# Altium PCB Controller.PcbDoc
Units mm, origin at the board's own origin, x right, y up, seen from the top; angles counter-clockwise.
Board outline 100 x 100 mm, 2 copper layers (Top Layer, Bottom Layer); 58 components, 87 nets, 249 pads, 178 vias.
Unrouted connection lines stored in the file: 3.
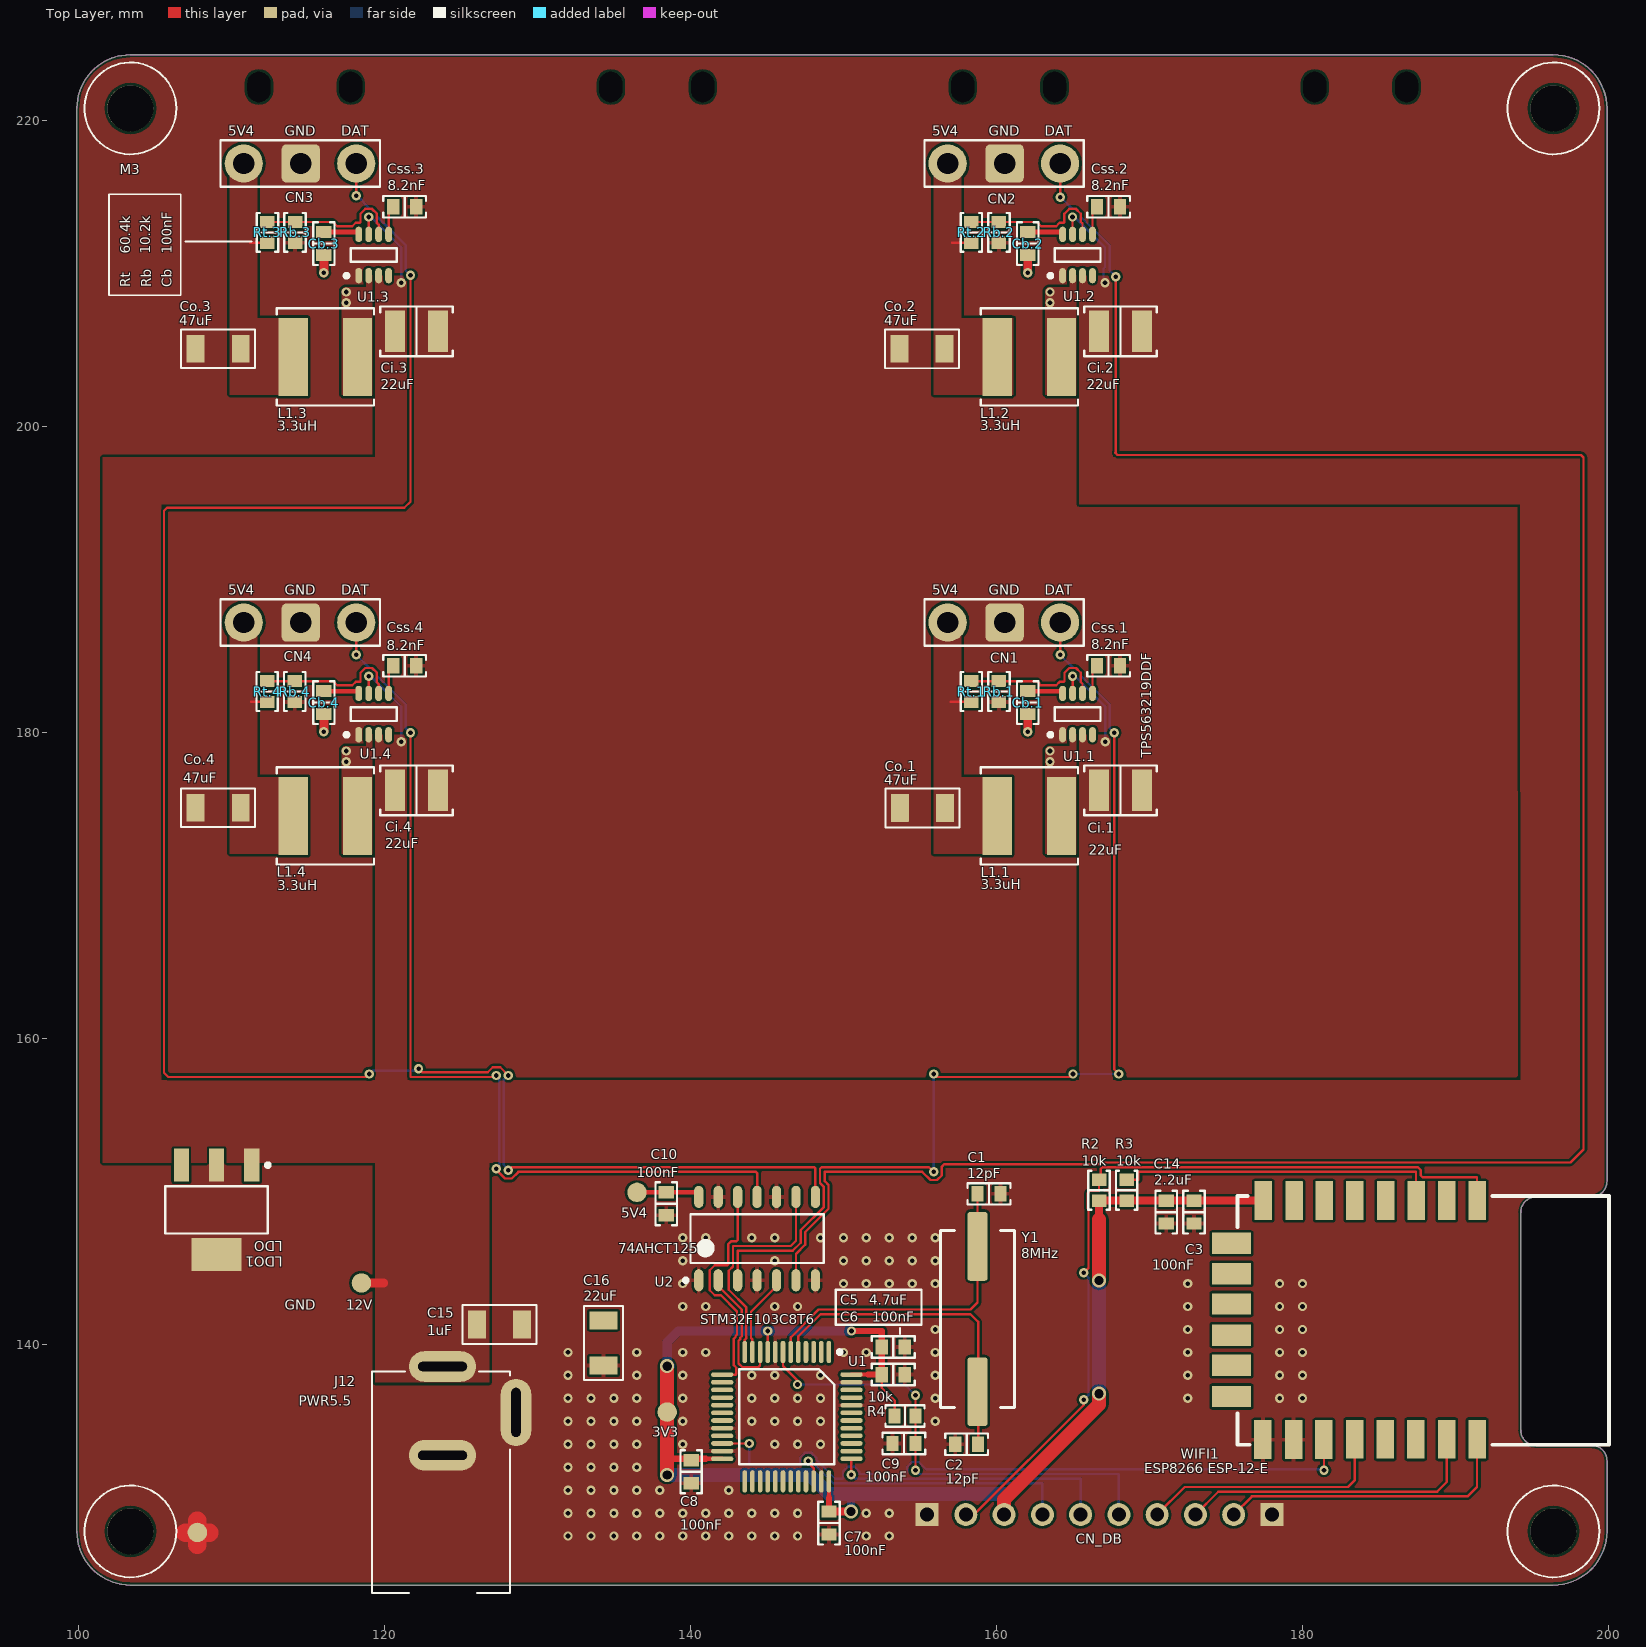
[diagram p0: Top Layer view]
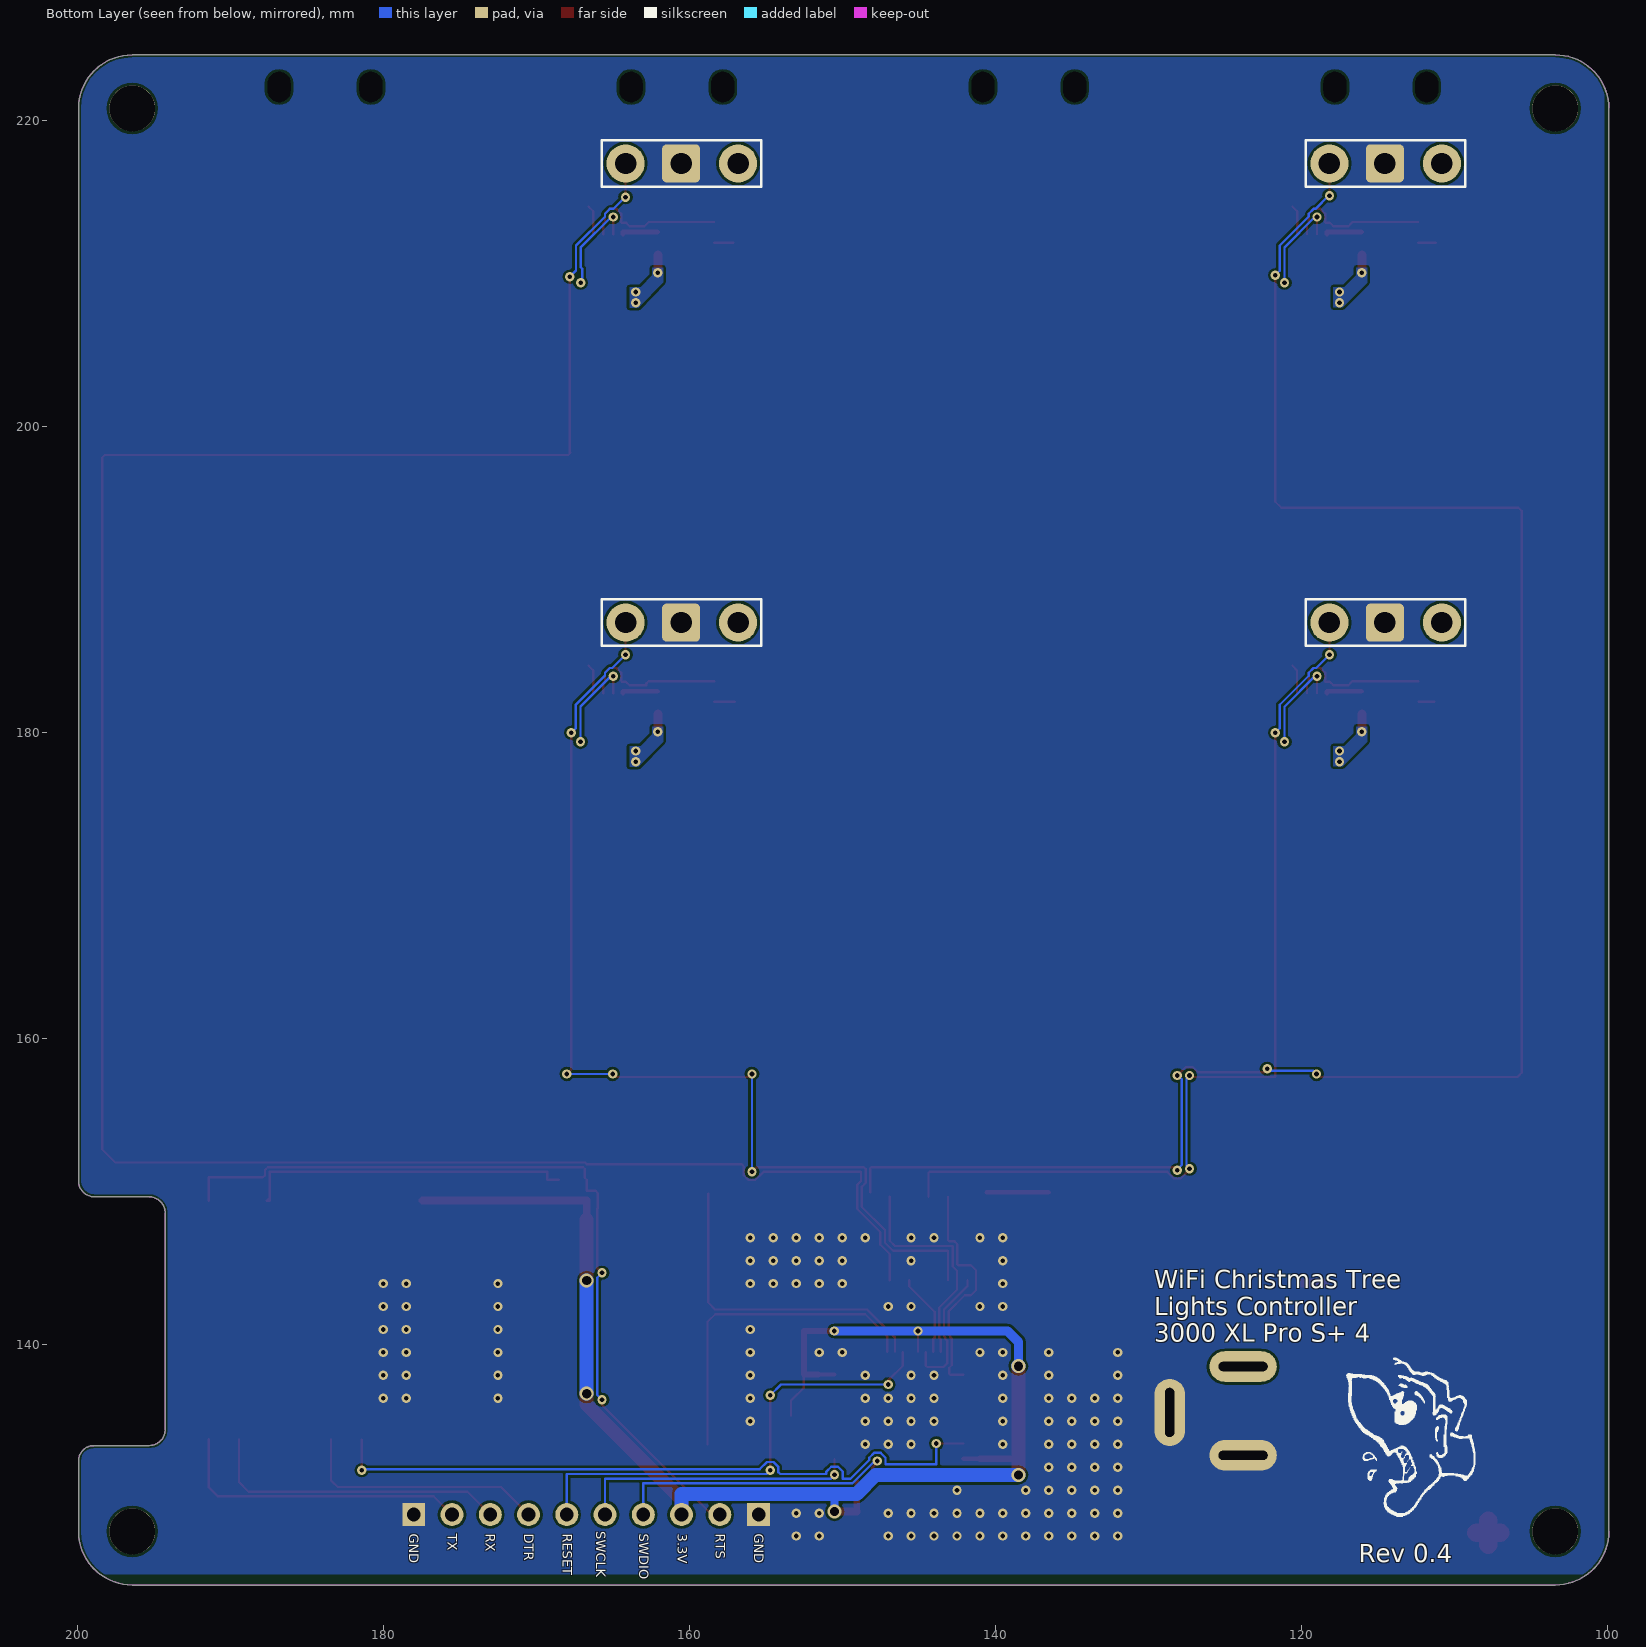
[diagram p1: Bottom Layer view, seen from below]
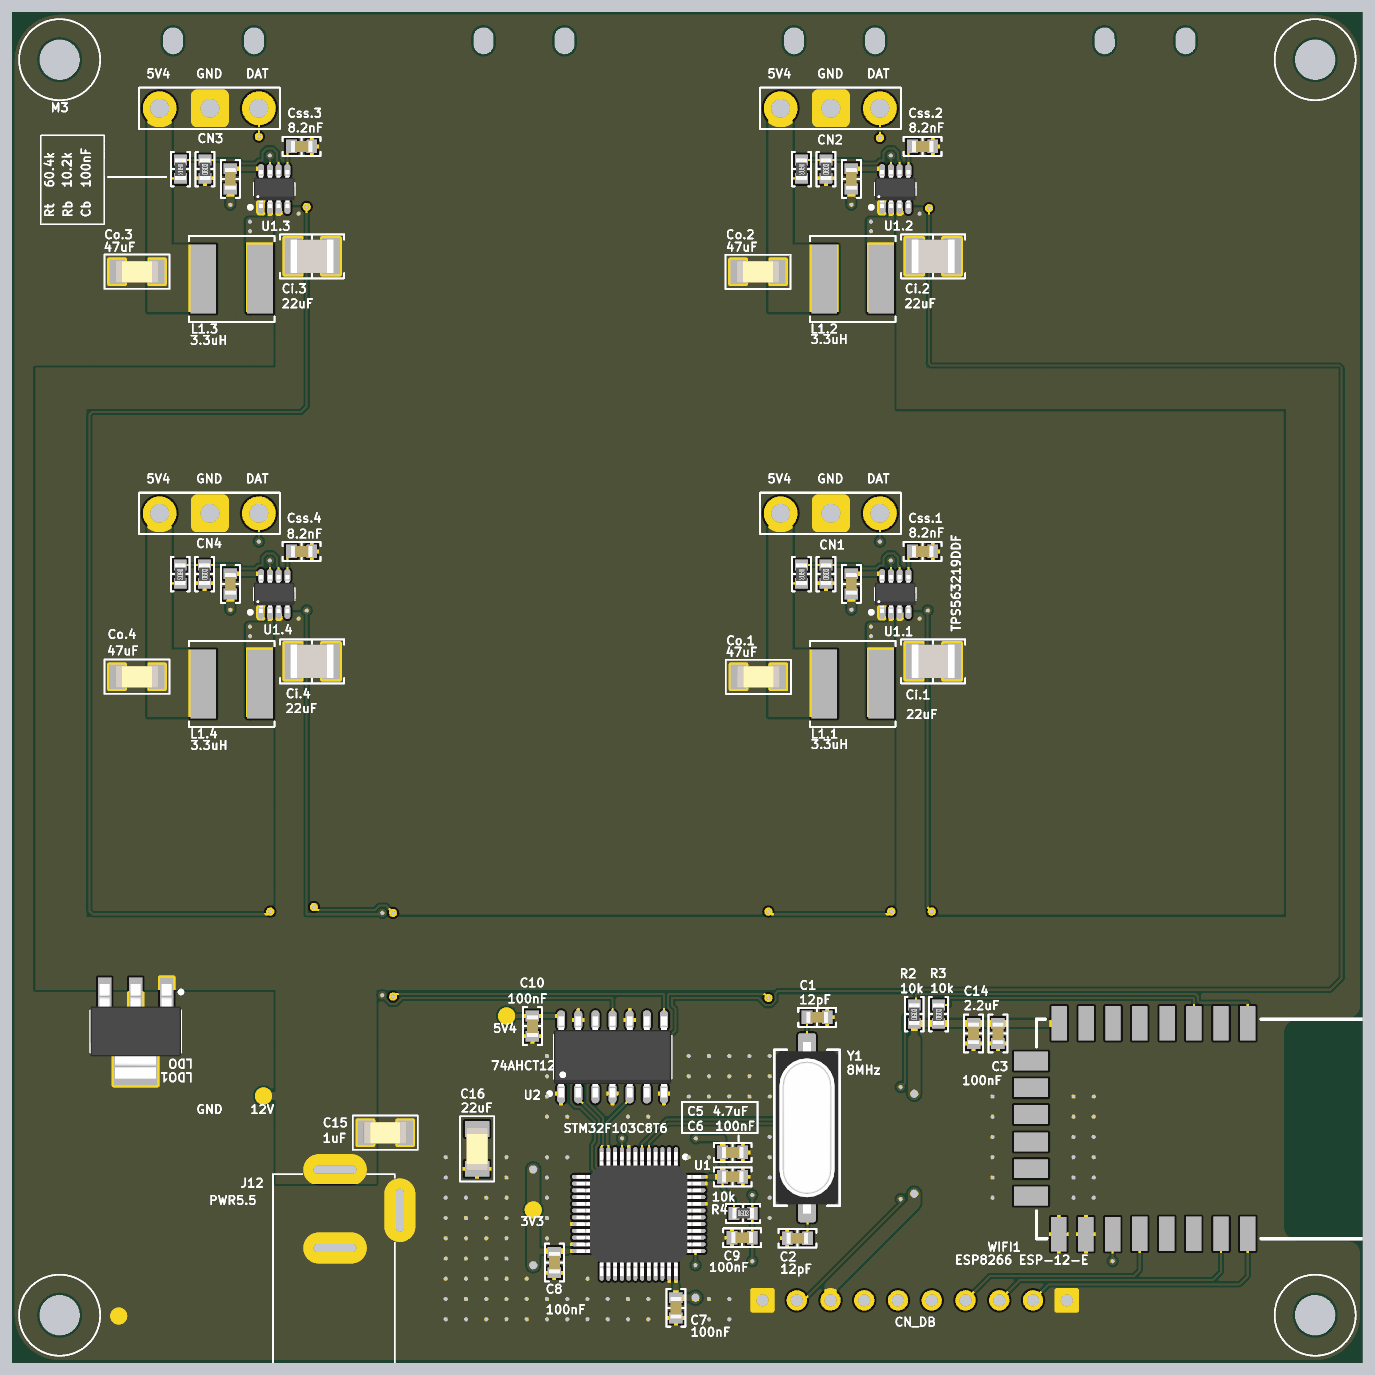
[diagram p2: 3D render of the assembled board from above, using the file's embedded part models]

## Layer stack, top to bottom
Top Solder: solder mask 0.0102, Solder Resist, Dk 3.5
Top Layer: signal copper 0.0356
Dielectric 1: dielectric 0.32, FR-4, Dk 4.8
Bottom Layer: signal copper 0.0356
Bottom Solder: solder mask 0.0102, Solder Resist, Dk 3.5

## Board outline
103.4,124.3 cw(c103.4,127.8) 99.9,127.8 99.9,220.8 cw(c103.4,220.8) 103.4,224.3 196.4,224.3 cw(c196.4,220.8) 199.9,220.8 199.9,150.7 cw(c198.886,150.686) 198.9,149.673 195.3,149.673 ccw(c195.3,148.625) 194.252,148.625 194.252,134.448 ccw(c195.283,134.448) 195.283,133.417 198.9,133.417 cw(c198.9,132.417) 199.9,132.417 199.9,127.8 cw(c196.4,127.8) 196.4,124.3

## Design rules (kind name [scope] priority, off if disabled: settings)
AssemblyTestPointUsage [All] p1 off:
AssemblyTestpoint [All] p1 off: testpointundercomponent=TRUE minsize=1.016 maxsize=2.54 preferedsize=1.524 minholesize=0 maxholesize=1.016 preferedholesize=0.813 testpointgrid=0.025 usegrid=TRUE gridtolerance=0 allowsidetop=TRUE allowsidebottom=TRUE
Clearance "Stitching GND" [IsStitchingVia and InNet('GND') vs (IsVia and (Not IsStitchingVia)) Or IsPad] p1: gap=0.406 except(0.66: Via-Via)
Clearance [All] p2: gap=0.152 except(0.165: THPad-Poly; 0.178: Track-SMDPad)
FabricationTestPointUsage [All] p1 off: valid=0 allowmultiple=FALSE
FabricationTestpoint [All] p1 off: side=3 testpointundercomponent=TRUE minsize=1.016 maxsize=2.54 preferedsize=1.524 minholesize=0 maxholesize=1.016 preferedholesize=0.813 testpointgrid=0.025 allowsidetop=TRUE allowsidebottom=TRUE usegrid=TRUE gridtolerance=0
HoleSize [All] p1: absolutevalues=TRUE maxlimit=6.3 minlimit=0.3 maxpercent=80.000 minpercent=20.000
MinimumAnnularRing [All] p1: minimumring=0.152
MinimumSolderMaskSliver [All] p1: minsoldermaskwidth=0.151
PlaneClearance [All] p1: clearance=0.152
PlaneConnect [All] p1: planeconnectstyle=Direct reliefexpansion=0.305 reliefentries=4 reliefconductorwidth=0.508 reliefairgap=0.152
PolygonConnect PolygonConnect_GND_VCC [InNet('GND') OR InNet('VCC12') OR InNet('VCC5_4.?') OR InNet('NetCb.?_?') vs IsVia Or InComponent('J12') OR InComponent('CN?') OR InComponent('C?.?') OR InComponent('L?.?') OR InComponent('U1.?') OR InComponent('CN_DB') OR (Name = 'Free-COOLER') OR InComponent('LDO1')OR InComponent('C15')] p1: connectstyle=Direct reliefconductorwidth=0.508 reliefentries=4 polygonreliefangle="90 Angle" airgapwidth=0.152
PolygonConnect [All] p2: connectstyle=Relief reliefconductorwidth=0.279 reliefentries=4 polygonreliefangle="90 Angle" airgapwidth=0.152
RoutingCorners [All] p1: cornerstyle=45-Degree minsetback=0.152 maxsetback=2.54
RoutingVias [All] p1: holewidth=0.61 width=1.219 viastyle="Through Hole" minholewidth=0.3 minwidth=0.6 maxholewidth=1.27 maxwidth=1.27
SilkToSilkClearance [All] p1: silktosilkclearance=0
SilkToSolderMaskClearance [IsPad AND NOT IsPad] p1: minsilkscreentomaskgap=0.254 clearancetoexposedcopper=TRUE
SolderMaskExpansion [All] p1: expansion=0.152
Width [All] p1: maxlimit=1.219 minlimit=0.152 preferedwidth=0.152
19 further rules are at their usual default settings.

## Classes and differential pairs
channel class Buck5: PS1 PS2 PS3 PS4
polygon class heatsinks: heatsink

## Components (designator, comment, footprint, x,y, rotation, side; value= is the part's Value field where it differs from the comment)
C1 "12pF" "CAP 0603/1608" 159.511,149.864 r180 top
C2 "12pF" "CAP 0603/1608" 158.05,133.501 r180 top
C3 "100nF" "CAP 0603/1608" 172.904,148.67 r270 top
C5 "4.7uF" "CAP 0603/1608" 153.254,139.855 r0 top
C6 "100nF" "CAP 0603/1608" 153.254,138.05 r0 top
C7 "100nF" "CAP 0603/1608" 149.05,128.346 r270 top
C8 "100nF" "CAP 0603/1608" 140.045,131.7 r270 top
C9 "100nF" "CAP 0603/1608" 153.954,133.542 r180 top
C10 "100nF" "CAP 0603/1608" 138.417,149.214 r270 top
C14 "2.2uF" "CAP 0603/1608" 171.099,148.67 r270 top
C15 "1uF" CAP1206 127.524,141.319 r180 top
C16 "22uF" CAP1206 134.32,140.117 r90 top
Cb.1 "100nF" "CAP 0603/1608" 162.045,181.969 r90 top (schematic designator Cb)
Cb.2 "100nF" "CAP 0603/1608" 162.045,211.969 r90 top (schematic designator Cb)
Cb.3 "100nF" "CAP 0603/1608" 116.044,211.969 r90 top (schematic designator Cb)
Cb.4 "100nF" "CAP 0603/1608" 116.044,181.969 r90 top (schematic designator Cb)
Ci.1 "22uF" "CAP 1210/3225 - 2.0MM" 168.105,176.233 r0 top (schematic designator Ci)
Ci.2 "22uF" "CAP 1210/3225 - 2.0MM" 168.105,206.233 r0 top (schematic designator Ci)
Ci.3 "22uF" "CAP 1210/3225 - 2.0MM" 122.1,206.233 r0 top (schematic designator Ci)
Ci.4 "22uF" "CAP 1210/3225 - 2.0MM" 122.1,176.233 r0 top (schematic designator Ci)
CN1 "CON3" LEDCON3 160.5,187.2 r0 top
CN2 "CON3" LEDCON3 160.5,217.2 r0 top
CN3 "CON3" LEDCON3 114.5,217.2 r0 top
CN4 "CON3" LEDCON3 114.5,187.2 r0 top
CN_DB "CONNECTOR" "Edge Connector" 158,128.9 r0 top
Co.1 "47uF" CAP1206 155.163,175.089 r0 top (schematic designator Co)
Co.2 "47uF" CAP1206 155.13,205.089 r0 top (schematic designator Co)
Co.3 "47uF" CAP1206 109.13,205.094 r0 top (schematic designator Co)
Co.4 "47uF" CAP1206 109.13,175.094 r0 top (schematic designator Co)
Css.1 "8.2nF" "CAP 0603/1608" 167.324,184.373 r0 top (schematic designator Css)
Css.2 "8.2nF" "CAP 0603/1608" 167.323,214.373 r0 top (schematic designator Css)
Css.3 "8.2nF" "CAP 0603/1608" 121.323,214.373 r0 top (schematic designator Css)
Css.4 "8.2nF" "CAP 0603/1608" 121.323,184.373 r0 top (schematic designator Css)
J12 "PWR5.5" DC_CON 128.6,135.579 r90 top
L1.1 "3.3uH" INDUCTOR_VLS6045 162.15,174.561 r180 top (schematic designator L1)
L1.2 "3.3uH" INDUCTOR_VLS6045 162.15,204.561 r180 top (schematic designator L1)
L1.3 "3.3uH" INDUCTOR_VLS6045 116.145,204.561 r180 top (schematic designator L1)
L1.4 "3.3uH" INDUCTOR_VLS6045 116.145,174.561 r180 top (schematic designator L1)
LDO1 "LDO" SOT230P700X180-4N 109.033,148.818 r270 top
R2 "10k" "RES 0603/1608" 166.702,150.1 r90 top
R3 "10k" "RES 0603/1608" 168.509,150.1 r90 top
R4 "10k" "RES 0603/1608" 154.024,135.346 r0 top
Rb.1 "10k" "RES 0603/1608" 160.161,182.693 r90 top (schematic designator Rb)
Rb.2 "10k" "RES 0603/1608" 160.161,212.693 r90 top (schematic designator Rb)
Rb.3 "10k" "RES 0603/1608" 114.16,212.693 r90 top (schematic designator Rb)
Rb.4 "10k" "RES 0603/1608" 114.14,182.693 r90 top (schematic designator Rb)
Rt.1 "60.4k" "RES 0603/1608" 158.356,182.693 r270 top (schematic designator Rt)
Rt.2 "60.4k" "RES 0603/1608" 158.356,212.693 r270 top (schematic designator Rt)
Rt.3 "60.4k" "RES 0603/1608" 112.356,212.693 r270 top (schematic designator Rt)
Rt.4 "60.4k" "RES 0603/1608" 112.335,182.693 r270 top (schematic designator Rt)
U1 "STM32F103C8T6" CQFP50P900X900X160-48N 146.3,135.3 r270 top
U1.1 "TPS563219DDF" TSOP65P280X110-8N 165.299,181.219 r90 top (schematic designator U1)
U1.2 "TPS563219DDF" TSOP65P280X110-8N 165.298,211.219 r90 top (schematic designator U1)
U1.3 "TPS563219DDF" TSOP65P280X110-8N 119.298,211.219 r90 top (schematic designator U1)
U1.4 "TPS563219DDF" TSOP65P280X110-8N 119.298,181.219 r90 top (schematic designator U1)
U2 "74AHCT125" SOIC127P600X173-14N 144.356,146.939 r90 top
WIFI1 "ESP8266 ESP-12-E" "ESP8266 ESP-12-E" 175,132.834 r270 top
Y1 "8MHz" CRYSTAL 158.761,141.683 r90 top

## Footprints (in the part's own frame and the unit in brackets; to place one, negate y for a bottom-side part, rotate by r counter-clockwise, add the part's x,y. Pads: shape width x height; smd on the part's side, far side on the other; paste and mask are expansions set on the pad)
CAP1206 [mm]
  rrect1% 1.16x1.82 smd: 1(1.475,0) 2(-1.475,0)
  silkscreen extent -2.41,-1.27 2.41,1.27, body extent -1.6,-0.81 1.6,0.81, height 0.57
"CAP 0603/1608" [mm] "Chip Capacitor, 2-Leads, Body 1.60x0.80mm, IPC Medium Density"
  rrect1% 0.8x1 smd: 1(-0.75,0) 2(0.75,0)
  silkscreen extent -1.4,-0.7 1.4,0.7, body extent -0.8,-0.41 0.8,0.41, height 0.82
"CAP 1210/3225 - 2.0MM" [mm] "Chip Capacitor, 2-Leads, Body 3.20x2.50mm, IPC Medium Density"
  rrect1% 1.3x2.7 smd: 1(-1.4,0) 2(1.4,0)
  silkscreen extent -2.37,-1.63 2.37,1.63, body extent -1.6,-1.25 1.6,1.25, height 2
CQFP50P900X900X160-48N [mm] "CQFP, 48-Leads, Body 9.00x9.00mm, Pitch 0.50mm, IPC Medium Density"
  oval 1.45x0.3 smd: 1(-4.225,2.75) 2(-4.225,2.25) 3(-4.225,1.75) 4(-4.225,1.25) 5(-4.225,0.75) 6(-4.225,0.25) 7(-4.225,-0.25) 8(-4.225,-0.75) 9(-4.225,-1.25) 10(-4.225,-1.75) 11(-4.225,-2.25) 12(-4.225,-2.75) 25(4.225,-2.75) 26(4.225,-2.25) 27(4.225,-1.75) 28(4.225,-1.25) 29(4.225,-0.75) 30(4.225,-0.25) 31(4.225,0.25) 32(4.225,0.75) 33(4.225,1.25) 34(4.225,1.75) 35(4.225,2.25) 36(4.225,2.75)
  oval 0.3x1.45 smd: 13(-2.75,-4.225) 14(-2.25,-4.225) 15(-1.75,-4.225) 16(-1.25,-4.225) 17(-0.75,-4.225) 18(-0.25,-4.225) 19(0.25,-4.225) 20(0.75,-4.225) 21(1.25,-4.225) 22(1.75,-4.225) 23(2.25,-4.225) 24(2.75,-4.225) 37(2.75,4.225) 38(2.25,4.225) 39(1.75,4.225) 40(1.25,4.225) 41(0.75,4.225) 42(0.25,4.225) 43(-0.25,4.225) 44(-0.75,4.225) 45(-1.25,4.225) 46(-1.75,4.225) 47(-2.25,4.225) 48(-2.75,4.225)
  silkscreen extent -4.35,-3.1 3.1,3.58, body extent -4.6,-4.6 4.6,4.6, height 1.45
CRYSTAL [mm] "Crystal, 2-Leads, Body 4.70x11.40mm, Pitch 8.80mm, IPC Medium Density"
  rrect25% 4.5x1.3 smd: 1(-4.75,0) 2(4.75,0)
  silkscreen extent -5.77,-2.43 5.77,2.43, body extent -6.35,-2.35 6.35,2.35, height 4.2
DC_CON [mm]
  oval 2x4.4 hole 0.6 slot 3.2 at 90 deg paste-2.54: 1(3,4.8) 2(-2.8,4.8)
  oval 4.4x2 hole 0.6 slot 3.2 at 0 deg paste-2.54: 3(0,0)
  silkscreen extent -11.81,0.38 2.67,9.4, body extent -11.83,0.43 2.67,9.43, height 10
"Edge Connector" [mm]
  rrect100% 1.5x1.5 hole 0.9: 1(0,0) 2(2.5,0) 3(5,0) 4(7.5,0) 5(10,0) 6(12.5,0) 7(15,0) 8(17.5,0)
  rrect1% 1.5x1.5 hole 0.9: 9(-2.54,0) 9(20,0)
"ESP8266 ESP-12-E" [mil] "ESP8266 ESP-12-E"
  rrect1% 100x45 smd: 1(-653,646) 2(-653,568) 3(-653,489) 4(-653,411) 5(-653,331) 6(-653,253) 7(-653,175) 8(-653,96) 15(-38,95) 16(-38,174) 17(-38,252) 18(-39,331) 19(-39,410) 20(-39,488) 21(-39,568) 22(-39,646)
  rrect1% 55x100 smd: 9(-543,14) 10(-465,14) 11(-387,14) 12(-307,14) 13(-229,14) 14(-149,14)
  silkscreen extent -665,30 -25,985
INDUCTOR_VLS6045 [mm]
  rrect1% 1.9x5.1 smd: 1(-2.1,0) 2(2.1,0)
  silkscreen extent -3.18,-3.18 3.18,3.18, body extent -3,-3 3,3, height 4.5
LEDCON3 [mm]
  round 2.5 hole 1.4 paste-2.54: 1(-3.692,0) 2(3.658,0)
  rrect25% 2.5x2.5 hole 1.4 paste-2.54: 3(0.033,0)
  silkscreen extent -5.21,-1.52 5.21,1.52
"RES 0603/1608" [mm] "Chip Resistor, 2-Leads, Body 1.60x0.80mm, IPC Medium Density"
  rrect1% 0.8x0.95 smd: 1(-0.68,0) 2(0.68,0)
  silkscreen extent -1.27,-0.7 1.27,0.7, body extent -0.8,-0.4 0.8,0.4, height 0.45
SOIC127P600X173-14N [mm] "SOIC, 14-Leads, Body 8.63x3.90mm, Pitch 1.27mm, IPC Medium Density"
  oval 1.45x0.6 smd: 1(-2.725,3.81) 2(-2.725,2.54) 3(-2.725,1.27) 4(-2.725,0) 5(-2.725,-1.27) 6(-2.725,-2.54) 7(-2.725,-3.81) 8(2.725,-3.81) 9(2.725,-2.54) 10(2.725,-1.27) 11(2.725,0) 12(2.725,1.27) 13(2.725,2.54) 14(2.725,3.81)
  silkscreen extent -2.85,-4.35 1.6,4.78, body extent -3,-4.35 3,4.35, height 1.73
SOT230P700X180-4N [mm] "SOT223, 4-Leads, Body 6.50x7.00mm (avg), Pitch 2.30mm, IPC Medium Density"
  rrect1% 2.15x1 smd: 1(-2.925,2.3) 2(-2.925,0) 3(-2.925,-2.3)
  rrect1% 2.15x3.25 smd: 4(2.925,0)
  silkscreen extent -3.05,-3.35 1.55,3.48, body extent -3.5,-3.35 3.5,3.35, height 1.8
TSOP65P280X110-8N [mm] "TSOP8 x 0.65mm"
  oval 1x0.45 smd: 1(-1.35,0.975) 2(-1.35,0.325) 3(-1.35,-0.325) 4(-1.35,-0.975) 5(1.35,-0.975) 6(1.35,-0.325) 7(1.35,0.325) 8(1.35,0.975)
  silkscreen extent -1.47,-1.5 0.45,1.9, body extent -1.4,-1.5 1.4,1.5, height 1.1

## Part data
C1 C2 C3 C5 C6 C7 C8 C9 C10 C14 C15 C16 Cb.1 Cb.2 Cb.3 Cb.4 Ci.1 Ci.2 Ci.3 Ci.4 Co.1 Co.2 Co.3 Co.4 Css.1 Css.2 Css.3 Css.4: library part CAP, "Capacitor"
J12: library part PWR2.5, "Low Voltage Power Supply Connector"
L1.1 L1.2 L1.3 L1.4: library part Inductor, "Inductor"
R2 R3 R4 Rb.1 Rb.2 Rb.3 Rb.4 Rt.1 Rt.2 Rt.3 Rt.4: library part RES, "Resistor"
U1: "Medium-density performance line ARM-based 32-bit MCU with 64 or 128 KB Flash, USB, CAN, 7 timers, 2 ADCs, 9 com. interfaces"
Y1: library part CRYSTAL, "SMT Crystal"

## Free pads (board coordinates)
  round 3 hole 3 unplated paste+0 mask+0: MPTR(103.4,127.8) MPTR(103.4,220.8) MPTR(196.4,127.8) MPTR(196.4,220.8)
  round 1.27 smd paste-1.27 mask+0: T(107.776,127.739) T(136.506,149.964) T(138.48,135.6)
  round 1.27 smd paste-10 mask+0: T(118.5,144.039)
  round 0 hole 1.5 slot 2 at 90 deg unplated: ""(111.8,222.2) ""(117.8,222.2) ""(134.8,222.2) ""(140.8,222.2) ""(157.8,222.2) ""(163.8,222.2) ""(180.8,222.2) ""(186.8,222.2)

## Via types
v1: diameter 0.61, hole 0.3, Top Layer to Bottom Layer, 126 vias
v2: diameter 0.61, hole 0.305, Top Layer to Bottom Layer, 47 vias
v3: diameter 0.914, hole 0.6, Top Layer to Bottom Layer, 5 vias

## Nets (pads, with @x,y where several pads share a name; then routed paths per layer and width w, separated by ;. In a path a pad name is that pad's centre, name@x,y a point inside that pad or via, vN(x,y) a via of type N, cw(c..) or ccw(c..) an arc to the next point about the centre after c; other vN are vias at no path point)
DTR: CN_DB.6 WIFI1.18 | length 16.5
  Top Layer w0.152: CN_DB.6 172.299,130.7 182.97,130.7 183.407,131.137 WIFI1.18
GND: C1.1 C2.2 C3.2 C5.2 C6.2 C7.2 C8.2 C9.2 C10.2 C14.2 C15.2 C16.2 Ci.1.2 Ci.2.2 Ci.3.2 Ci.4.2 CN1.3 CN2.3 CN3.3 CN4.3 CN_DB.9 Co.1.2 Co.2.2 Co.3.2 Co.4.2 Css.1.2 Css.2.2 Css.3.2 Css.4.2 J12.2 J12.3 LDO1.2 LDO1.4 pad.T@107.776,127.739 Rb.1.1 Rb.2.1 Rb.3.1 Rb.4.1 U1.1.1 U1.2.1 U1.3.1 U1.4.1 U1.8 U1.20 U1.23 U1.35 U1.44 U1.47 U2.1 U2.4 U2.7 U2.10 U2.13 WIFI1.15 WIFI1.16 | length 3.1
  Top Layer w1.219: 107,127.718 pad.T@107.776,127.718 ; 107.776,126.942 pad.T@107.776,127.718 ; 107.776,128.493 107.776,127.739 pad.T@107.776,127.718 ; 108.552,127.718 pad.T@107.776,127.718
  other v1: 132,127.5 133.5,127.5 135,127.5 136.5,127.5 138,127.5 139.5,127.5 141,127.5 142.5,127.5 144,127.5 145.5,127.5 147,127.5 151.5,127.5 153,127.5 132,129 133.5,129 135,129 136.5,129 138,129 139.5,129 141,129 142.5,129 144,129 145.5,129 147,129 151.5,129 153,129 132,130.5 133.5,130.5 135,130.5 136.5,130.5 138,130.5 142.5,130.5 132,132 133.5,132 135,132 136.5,132 132,133.5 133.5,133.5 135,133.5 136.5,133.5 139.5,133.5 145.5,133.5 147,133.5 148.5,133.5 132,135 133.5,135 135,135 136.5,135 139.5,135 144,135 145.5,135 147,135 148.5,135 156,135 132,136.5 133.5,136.5 135,136.5 136.5,136.5 139.5,136.5 144,136.5 145.5,136.5 147,136.5 148.5,136.5 156,136.5 172.5,136.5 178.5,136.5 180,136.5 132,138 136.5,138 139.5,138 144,138 145.5,138 148.5,138 156,138 172.5,138 178.5,138 180,138 132,139.5 136.5,139.5 139.5,139.5 141,139.5 150,139.5 151.5,139.5 156,139.5 172.5,139.5 178.5,139.5 180,139.5 156,141 172.5,141 178.5,141 180,141 139.5,142.5 141,142.5 145.5,142.5 147,142.5 172.5,142.5 178.5,142.5 180,142.5 139.5,144 150,144 151.5,144 153,144 154.5,144 156,144 172.5,144 178.5,144 180,144 139.5,145.5 145.5,145.5 150,145.5 151.5,145.5 153,145.5 154.5,145.5 156,145.5 139.5,147 141,147 144,147 145.5,147 148.5,147 150,147 151.5,147 153,147 154.5,147 156,147
LD0: U1.10 U2.2 | length 8.6
  Top Layer w0.152: U2.2 141.816,143.844 143.352,142.308 143.352,140.553 143.245,140.445 143.245,140.367 143.146,140.268 143.146,138.783 143.382,138.546 144.447,138.546 144.55,138.65 U1.10
LD1: U1.11 U2.5 | length 5.4
  Top Layer w0.152: U1.11 144.05,140.35 143.962,140.438 143.962,142.162 145.626,143.826 U2.5
LD2: U1.12 U2.9 | length 14.7
  Top Layer w0.152: U1.12 143.55,140.319 143.657,140.426 143.657,142.435 142.5,143.592 142.5,144.836 142.781,145.118 142.781,146.45 146.55,146.45 146.9,146.8 U2.9@146.9,149.664
LD3: U1.13 U2.12 | length 15.1
  Top Layer w0.152: U1.13 142.95,138.05 143,138.1 143,138.498 142.841,138.657 142.841,140.394 142.94,140.493 142.94,140.572 143.047,140.679 143.047,142.182 141.995,143.235 141.587,143.235 141.262,143.559 141.262,144.868 141.587,145.193 142.426,145.193 142.477,145.244 142.477,146.577 142.655,146.755 142.985,146.755 143.086,146.857 U2.12
LH0: CN1.2 U2.3 | length 69.3
  Top Layer w0.152: U2.3 143.086,146.145 146.677,146.145 147.205,146.674 147.205,147.494 148.72,149.009 148.72,150.318 148.471,150.568 148.471,151.502 148.574,151.605 155.595,151.605 v2(155.9,151.3) ; v2(155.9,157.7) 156.1,157.5 164.8,157.5 v2(165,157.7) ; v2(164.158,185.1) CN1.2 ; v2(167.7,180) 167.7,158 v2(168,157.7)
  Bottom Layer w0.152: v2(155.9,151.3) v2(155.9,157.7) ; v2(164.158,185.1) 165.025,184.233 165.195,184.233 165.507,183.921 165.507,183.742 167.405,181.845 167.405,180.295 v2(167.7,180) ; v2(165,157.7) v2(168,157.7)
LH1: CN2.2 U2.6 | length 155.6
  Top Layer w0.152: U2.6 146.896,145.934 147.51,146.547 147.51,147.368 149.025,148.883 149.025,150.445 148.776,150.694 148.776,151.3 155.146,151.3 155.679,150.767 156.121,150.767 156.433,151.079 156.433,151.651 156.588,151.805 166.696,151.805 166.801,151.91 197.51,151.91 198.365,152.765 198.365,197.986 198.2,198.151 167.914,198.151 167.765,198.3 167.8,198.335 v2(167.8,209.8) ; CN2.2 164.158,215.042 v2@164.2,215
  Bottom Layer w0.152: v2@164.2,215 164.967,214.233 165.194,214.233 165.506,213.921 165.506,213.725 167.4,211.831 167.4,210.2 v2(167.8,209.8)
  other v2: 164.158,215
LH2: CN3.2 U2.8 | length 128.2
  Top Layer w0.152: CN3.2 118.158,215.142 v2@118.2,215.1 ; v2(119,157.7) 118.8,157.5 105.872,157.5 105.6,157.772 105.6,194.5 105.8,194.7 121.3,194.7 121.7,195.1 v2(121.7,209.9) ; v2(122.233,158.033) 122.462,157.805 126.75,157.805 127.079,158.133 127.566,158.133 v2(128.1,157.6) ; v2(128.1,151.4) 128.305,151.605 148.095,151.605 148.166,151.534 U2.8@148.166,149.964
  Bottom Layer w0.152: v2@118.2,215.1 119.067,214.233 119.194,214.233 119.506,213.921 119.506,213.743 121.405,211.845 121.405,210.195 v2(121.7,209.9) ; v2(119,157.7) 119.2,157.9 122.1,157.9 v2(122.233,158.033) ; v2(128.1,151.4) 128.1,151.455 127.805,151.75 127.805,157.35 128.054,157.6 v2(128.1,157.6)
  other v2: 118.158,215.1
LH3: CN4.2 U2.11 | length 62.2
  Top Layer w0.152: v2@118.158,185.15 CN4.2 ; v2(121.7,180) 121.7,157.5 127.2,157.5 v2(127.3,157.6) ; v2(127.3,151.5) 127.3,151.445 127.879,150.866 128.321,150.866 128.754,151.3 144.285,151.3 144.356,151.229 U2.11
  Bottom Layer w0.152: v2(118.158,185.1) 119.024,184.233 119.194,184.233 119.507,183.921 119.507,183.724 121.405,181.826 121.405,180.295 v2(121.7,180) ; v2(127.3,151.5) 127.5,151.7 127.5,157.4 v2(127.3,157.6)
NetCb.1_1: Cb.1.1 L1.1.1 U1.1.2 | length 1.2
  Top Layer w0.584: v2(162.045,180.056) Cb.1.1
  other v2: 163.5,178.1 163.5,178.8
NetCb.1_2: Cb.1.2 U1.1.8 | length 2.4
  Top Layer w0.305: Cb.1.2@162.065,182.719 164.324,182.719 U1.1.8
NetCb.2_1: Cb.2.1 L1.2.1 U1.2.2 | length 1.2
  Top Layer w0.584: v2(162.045,210.056) Cb.2.1
  other v2: 163.5,208.1 163.5,208.8
NetCb.2_2: Cb.2.2 U1.2.8 | length 2.4
  Top Layer w0.305: Cb.2.2@162.065,212.719 164.323,212.719 U1.2.8
NetCb.3_1: Cb.3.1 L1.3.1 U1.3.2 | length 1.2
  Top Layer w0.584: v2(116.044,210.056) Cb.3.1
  other v2: 117.5,208.1 117.5,208.8
NetCb.3_2: Cb.3.2 U1.3.8 | length 2.4
  Top Layer w0.305: Cb.3.2 118.323,212.719 U1.3.8
NetCb.4_1: Cb.4.1 L1.4.1 U1.4.2 | length 1.1
  Top Layer w0.584: v2@116.044,180.1 Cb.4.1
  other v2: 117.5,178.1 117.5,178.8 116.044,180.056
NetCb.4_2: Cb.4.2 U1.4.8 | length 2.4
  Top Layer w0.305: Cb.4.2 118.323,182.719 U1.4.8
NetCss.1_1: Css.1.1 U1.1.5 | length 1.9
  Top Layer w0.152: U1.1.5 166.274,184.073 Css.1.1
NetCss.2_1: Css.2.1 U1.2.5 | length 1.9
  Top Layer w0.152: U1.2.5 166.273,214.073 Css.2.1
NetCss.3_1: Css.3.1 U1.3.5 | length 1.9
  Top Layer w0.152: U1.3.5 120.273,214.073 Css.3.1
NetCss.4_1: Css.4.1 U1.4.5 | length 1.9
  Top Layer w0.152: U1.4.5 120.273,184.073 Css.4.1
NetR3_2: R3.2 WIFI1.3 | length 21.8
  Top Layer w0.152: R3.2 169.28,150.78 169.28,151.3 187.42,151.3 WIFI1.3@187.42,149.611 ; WIFI1.3@187.42,149.611 187.611,149.42 WIFI1.3 WIFI1.3@187.42,149.611
NetRb.1_2: Rb.1.2 Rt.1.1 U1.1.6 | length 9.7
  Top Layer w0.152: Rt.1.1 Rb.1.2 162.648,183.373 162.799,183.222 162.799,183.1 163.903,183.1 164.126,183.323 164.384,183.323 164.441,183.379 164.441,183.921 164.753,184.233 165.195,184.233 165.507,183.921 165.507,183.311 165.624,183.195 U1.1.6
NetRb.2_2: Rb.2.2 Rt.2.1 U1.2.6 | length 9.6
  Top Layer w0.152: Rt.2.1 Rb.2.2 162.648,213.373 162.921,213.1 163.902,213.1 164.125,213.323 164.404,213.323 164.44,213.358 164.44,213.921 164.752,214.233 165.194,214.233 165.506,213.921 165.506,213.394 165.623,213.277 U1.2.6
NetRb.3_2: Rb.3.2 Rt.3.1 U1.3.6 | length 9.6
  Top Layer w0.152: Rt.3.1 Rb.3.2 116.647,213.373 116.92,213.1 117.902,213.1 118.125,213.323 118.404,213.323 118.44,213.358 118.44,213.921 118.752,214.233 119.194,214.233 119.506,213.921 119.506,213.312 119.623,213.196 U1.3.6
NetRb.4_2: Rb.4.2 Rt.4.1 U1.4.6 | length 9.6
  Top Layer w0.152: Rt.4.1 Rb.4.2 116.647,183.373 116.92,183.1 117.902,183.1 118.125,183.323 118.423,183.323 118.44,183.34 118.44,183.921 118.752,184.233 119.194,184.233 119.507,183.921 119.507,183.293 119.623,183.177 U1.4.6
NetU1.1_4: U1.1.4
NetU1.2_4: U1.2.4
NetU1.3_4: U1.3.4
NetU1.4_4: U1.4.4
NetU1_1: U1.1
NetU1_2: U1.2
NetU1_3: U1.3
NetU1_4: U1.4
NetU1_14: U1.14
NetU1_15: U1.15
NetU1_16: U1.16
NetU1_17: U1.17
NetU1_18: U1.18
NetU1_19: U1.19
NetU1_21: U1.21
NetU1_25: U1.25
NetU1_26: U1.26
NetU1_27: U1.27
NetU1_28: U1.28
NetU1_29: U1.29
NetU1_30: U1.30
NetU1_31: U1.31
NetU1_32: U1.32
NetU1_33: U1.33
NetU1_38: U1.38
NetU1_39: U1.39
NetU1_40: U1.40
NetU1_41: U1.41
NetU1_42: U1.42
NetU1_43: U1.43
NetU1_45: U1.45
NetU1_46: U1.46
NetWIFI1_2: WIFI1.2
NetWIFI1_4: WIFI1.4
NetWIFI1_5: WIFI1.5
NetWIFI1_6: WIFI1.6
NetWIFI1_7: WIFI1.7
NetWIFI1_9: WIFI1.9
NetWIFI1_10: WIFI1.10
NetWIFI1_11: WIFI1.11
NetWIFI1_12: WIFI1.12
NetWIFI1_13: WIFI1.13
NetWIFI1_14: WIFI1.14
NetWIFI1_19: WIFI1.19
NetWIFI1_20: WIFI1.20
OSC_IN: C2.1 U1.5 Y1.1 | length 21.6
  Top Layer w0.152: U1.5 147.05,140.55 148.5,142 158.3,142 158.8,141.5 C2.1
OSC_OUT: C1.2 U1.6 Y1.2 | length 21.2
  Top Layer w0.152: U1.6 146.55,140.481 148.374,142.305 158.305,142.305 158.761,142.761 Y1.2 C1.2
RST1: C9.1 CN_DB.5 R4.2 U1.7 | length 31.5
  Top Layer w0.152: U1.7 146.05,138.609 147,137.659 v2(147,137.4) ; v2(154.704,131.8) C9.1 R4.2 v2(154.704,136.702)
  Bottom Layer w0.152: v2(147,137.4) 154.006,137.4 v2(154.704,136.702) ; v2(154.704,131.8) 154.949,131.555 168,131.555 CN_DB.5
RTS: CN_DB.1 R2.2 WIFI1.1 | length 53.8
  Top Layer w0.152: CN_DB.1 158.531,128.9 165.7,136.07 v2(165.7,136.4) ; v2(165.7,144.7) 166.016,145.016 166.016,148.874 165.973,148.917 165.973,149.923 166.124,150.074 166.702,150.074 R2.2 166.822,150.9 166.822,151.5 166.927,151.605 187.547,151.605 187.725,151.426 187.725,151.07 187.851,150.944 191.408,150.944 WIFI1.1
  Bottom Layer w0.152: v2(165.7,136.4) 166.014,136.714 166.014,144.386 v2(165.7,144.7)
RX0: CN_DB.7 WIFI1.21 | length 20.1
  Top Layer w0.152: CN_DB.7 174.495,130.395 188.795,130.395 189.427,131.027 WIFI1.21
SWCLK: CN_DB.4 U1.37 | length 18.5
  Top Layer w0.152: v2(150.5,131.5) U1.37@150.5,132.526
  Bottom Layer w0.152: v2(150.5,131.5) 150.749,131.251 165.5,131.251 CN_DB.4
SWDIO: CN_DB.3 U1.34 | length 19.4
  Top Layer w0.152: v2(147.7,132.4) 147.7,132.3 148.05,131.95 U1.34
  Bottom Layer w0.152: v2(147.7,132.4) 147.87,132.4 148.098,132.171 148.108,132.171 149.334,130.946 163,130.946 CN_DB.3
TX0: CN_DB.8 WIFI1.22 | length 19.8
  Top Layer w0.152: CN_DB.8 176.69,130.09 190.786,130.09 191.408,130.713 WIFI1.22
TX1: U1.22 WIFI1.17 | length 45.7
  Top Layer w0.152: U1.22 v2(143.85,133.55) ; v2(181.401,131.8) WIFI1.17
  Bottom Layer w0.152: v2(143.85,133.55) 143.85,132.2 147.167,132.2 147.167,132.621 147.479,132.933 147.921,132.933 148.233,132.621 148.233,132.476 148.235,132.476 149.46,131.251 149.967,131.251 149.967,131.721 150.279,132.033 150.721,132.033 151.033,131.721 151.033,131.555 154.055,131.555 154.171,131.671 154.171,132.021 154.483,132.333 154.925,132.333 155.398,131.86 181.34,131.86 v2(181.401,131.8)
VCC3_3: C3.1 C5.1 C6.1 C7.1 C8.1 C14.1 C16.1 CN_DB.2 LDO1.3 pad.T@138.48,135.6 R2.1 R3.1 R4.1 U1.9 U1.24 U1.36 U1.48 WIFI1.8 | length 98.1
  Top Layer w0.152: U1.9 v1(145.05,140.9) ; C6.1 152.504,137.196 153.344,136.356 R4.1
  Top Layer w0.279: 149.05,130 U1.36 ; U1.48 151.6,138.05
  Top Layer w0.3: 141,132.55 U1.24
  Top Layer w0.406: 138.7,132.55 141,132.55 ; C7.1 149.05,130 ; v1(150.525,140.9) 152.5,140.9 152.504,140.896 C5.1 C6.1 151.6,138.05
  Top Layer w0.508: C7.1 150.376,129.096 v3@150.5,128.973 ; 166.702,148.2 R2.1 ; R2.1@166.704,149.42 R3.1 C14.1 C3.1 WIFI1.8
  Top Layer w0.914: v3(138.48,131.498) 138.48,135.6 v3(138.48,138.6) ; CN_DB.2 160.5,129.9 166.7,136.1 v3(166.7,136.8) ; v3@166.702,144.202 166.702,148.2
  Bottom Layer w0.508: v3@150.5,128.973 v3(150.5,129.096) 150.5,130.26
  Bottom Layer w0.61: v3(138.48,138.6) 138.48,140.18 139.2,140.9 v1(145.05,140.9) v1(150.525,140.9)
  Bottom Layer w0.914: v3(138.48,131.498) 138.492,131.486 147.824,131.486 149.05,130.26 150.5,130.26 160.5,130.26 CN_DB.2 ; v3(138.48,138.6) v3@138.5,138.62 ; v3(166.7,136.8) v3(166.7,144.2)
VCC5_4.1: CN1.1 Co.1.1 L1.1.2 Rt.1.2 | length 1.3
  Top Layer w0.152: 157.013,182.013 Rt.1.2
VCC5_4.2: C10.1 CN2.1 Co.2.1 L1.2.2 pad.T@136.506,149.964 Rt.2.2 U2.14 | length 5.3
  Top Layer w0.152: 157.113,212.013 Rt.2.2
  Top Layer w0.305: pad.T@136.506,149.964 C10.1 U2.14@140.546,149.964
VCC5_4.3: CN3.1 Co.3.1 L1.3.2 Rt.3.2 | length 1.1
  Top Layer w0.152: 111.213,212.013 Rt.3.2
VCC5_4.4: CN4.1 Co.4.1 L1.4.2 Rt.4.2 | length 1
  Top Layer w0.152: 111.287,182.013 Rt.4.2
VCC12: C15.1 Ci.1.1 Ci.2.1 Ci.3.1 Ci.4.1 J12.1 LDO1.1 pad.T@118.5,144.039 U1.1.3 U1.1.7 U1.2.3 U1.2.7 U1.3.3 U1.3.7 U1.4.3 U1.4.7 | length 27.1
  Top Layer w0.152: U1.4.7 v2(118.973,183.7) ; U1.3.7 v2(118.973,213.7) ; U1.2.7 v2(164.973,213.7) ; U1.1.7 v2(164.974,183.7)
  Top Layer w0.61: pad.T@118.5,144.039 119.939,144.039
  Bottom Layer w0.152: v2(118.973,183.7) 119.1,183.7 121.1,181.7 v2(121.1,179.4) ; v2(118.973,213.7) 119.119,213.7 121.1,211.719 v2(121.1,209.4) ; v2(164.973,213.7) 165.1,213.7 167.095,211.705 167.095,210.424 166.992,210.321 166.992,209.503 v2(167.095,209.4) ; v2(164.974,183.7) 165.119,183.7 167.1,181.719 v2(167.1,179.4)

## Polygon pours and split planes (outlines as drawn)
NetCb.1_1 on Bottom Layer "SW4" (solid, pour order 30): 161.7,180.4 161.7,179.4 163.33,177.77 163.9,177.77 163.9,179.119 163.181,179.119 162.4,179.9 162.4,180.4
GND on Bottom Layer "BOTTOMGND" (solid, remove dead copper, pour order 34): 100.2,225 200.2,225 200.2,125 100.2,125
NetCb.3_1 on Bottom Layer "SW4" (solid, pour order 28): 115.7,210.4 115.7,209.4 117.3,207.8 117.9,207.8 117.9,209.119 117.181,209.119 116.4,209.9 116.4,210.4
NetCb.2_1 on Bottom Layer "SW4" (solid, pour order 29): 161.7,210.4 161.7,209.43 163.315,207.77 163.9,207.77 163.9,209.119 163.181,209.119 162.4,209.9 162.4,210.4
NetCb.4_1 on Bottom Layer "SW4" (solid, pour order 27): 115.7,180.4 115.7,179.4 117.3,177.8 117.9,177.8 117.9,179.119 117.181,179.119 116.4,179.9 116.4,180.4
VCC12 on Top Layer "BOTTOM_V12" (solid, remove dead copper, pour order 13): 198.2,151.9 126.865,151.9 126.865,137.535 119.4,137.535 119.4,151.9 101.6,151.9 101.6,197.986 119.4,197.986 119.4,209.869 121.5,209.869 121.5,194.916 105.4,194.916 105.4,157.3 119.4,157.3 119.4,179.869 121.5,179.869 121.5,157.3 165.4,157.3 165.4,179.869 167.6,179.869 167.6,157.3 194.248,157.3 194.231,194.916 165.4,194.916 165.4,209.869 167.6,209.869 167.6,197.986 195.3,197.986 198.2,197.986
VCC5_4.1 on Top Layer "V544_LOWER" (solid, pour order 15): 155.9,172.1 155.9,187.2 157.7,187.2 157.7,177.1 161,177.1 161,172.1
NetCb.1_1 on Top Layer "CB41" (solid, pour order 25): 165.2,172.1 165.2,179.9 164.8,179.9 164.8,179.1 163.356,179.1 163.2,178.944 163.2,172.1
NetCb.4_1 on Top Layer "CB41" (solid, pour order 2): 119.2,172.1 119.2,179.9 118.8,179.9 118.8,179.1 117.356,179.1 117.2,178.944 117.2,172.1
NetCb.3_1 on Top Layer "CB41" (solid, pour order 24): 119.2,202.1 119.2,209.9 118.8,209.9 118.8,209.1 117.36,209.1 117.2,208.94 117.2,202.1
NetCb.2_1 on Top Layer "CB41" (solid, pour order 26): 165.2,202.1 165.2,209.9 164.8,209.9 164.8,209.1 163.341,209.1 163.2,208.959 163.2,202.1
VCC5_4.4 on Top Layer "V544_LOWER" (solid, pour order 16): 109.9,172.1 109.9,187.2 111.7,187.2 111.7,177.1 115,177.1 115,172.1
GND on Top Layer "TOPGND" (solid, remove dead copper, pour order 32): 99.9,224.3 199.9,224.3 199.9,124.3 99.9,124.3
VCC5_4.2 on Top Layer "V544_LOWER" (solid, pour order 17): 155.9,202.1 155.9,217.2 157.7,217.2 157.7,207.1 161.1,207.1 161.1,202.1
VCC5_4.3 on Top Layer "V544_LOWER" (solid, pour order 14): 109.9,202.1 109.9,217.2 111.7,217.2 111.7,207.1 115,207.1 115,202.1
no net on Top Overlay "box" (none, pour order 0): 102,215.2 102,208.6 106.7,208.6 106.7,215.2
no net on Bottom Solder "heatsink" (solid): 126.224,190.025 126.224,170.025 146.224,170.025 146.224,190.025
no net on Bottom Solder "heatsink" (solid): 106.286,215.089 106.286,195.089 126.286,195.089 126.286,215.089
no net on Bottom Solder "heatsink" (solid): 171.224,190.025 171.224,170.025 191.224,170.025 191.224,190.025
no net on Bottom Solder "heatsink" (solid): 191.286,199.089 191.286,219.089 171.286,219.089 171.286,199.089

## Keep-outs
Keep-Out Layer:
  lines w0.025: 99.9,127.8 ccw(c103.4,127.8) 103.4,124.3 196.4,124.3 ccw(c196.4,127.8) 199.9,127.8 199.9,132.417 ccw(c198.9,132.417) 198.9,133.417 195.283,133.417 cw(c195.283,134.448) 194.252,134.448 194.252,148.625 cw(c195.3,148.625) 195.3,149.673 198.9,149.673 ccw(c198.886,150.686) 199.9,150.7 199.9,151.8 199.9,220.8 ccw(c196.4,220.8) 196.4,224.3 103.4,224.3 ccw(c103.4,220.8) 99.9,220.8 99.9,127.8

## Silkscreen, mask and mechanical layers (free items; w line width, h text height)
Top Overlay:
  circle w0.127: c103.4,220.8 r3
  circle w0.127: c196.4,220.8 r3
  circle w0.127: c196.4,127.8 r3
  circle w0.127: c103.4,127.8 r3
  lines w0.152: 107,212.1 111.3,212.1 ; 153.7,140.7 153.7,141.1 ; 149.5,141.3 149.5,143.6 155.1,143.6 155.1,141.3 149.5,141.3
  text "M3" at 102.7,216.5 h0.64
  text "60.4k" at 103.4,211.3 h0.64 r90
  text "10.2k" at 104.7,211.3 h0.64 r90
  text "100nF" at 106.1,211.3 h0.64 r90
  text "Rt" at 103.4,209.1 h0.64 r90
  text "Rb" at 104.75,209.1 h0.64 r90
  text "Cb" at 106.1,209.1 h0.64 r90
  text "5V4" at 135.474,148.3 h0.64
  text "GND" at 113.5,142.297 h0.64
  text "12V" at 117.5,142.297 h0.64
  text "3V3" at 137.5,134 h0.64
Bottom Overlay:
  drawing of 10 lines, arcs and shapes, not listed
  text "WiFi Christmas Tree / Lights Controller / 3000 XL Pro S+ 4" at 129.619,140.189 h1.17
  text "SWCLK" at 166.075,127.803 h0.61 r90
  text "GND" at 155.756,127.651 h0.61 r90
  text "RTS" at 158.26,127.651 h0.61 r90
  text "3.3V" at 160.763,127.651 h0.61 r90
  text "SWDIO" at 163.267,127.651 h0.61 r90
  text "RESET" at 168.274,127.651 h0.61 r90
  text "DTR" at 170.778,127.651 h0.61 r90
  text "RX" at 173.285,127.651 h0.61 r90
  text "TX" at 175.781,127.651 h0.61 r90
  text "GND" at 178.288,127.651 h0.61 r90
  text "Rev 0.4" at 116.254,125.793 h1.17

## Dimensions
196.4,220.8 to 196.4,224.3 on Mechanical 2
196.4,220.8 to 199.9,220.8 on Mechanical 2
103.4,220.8 to 99.9,220.8 on Mechanical 2
99.9,127.8 to 199.9,127.8 on Mechanical 2
103.4,127.8 to 99.9,127.8 on Mechanical 2
103.4,224.3 to 103.4,124.3 on Mechanical 2
103.4,127.8 to 103.4,124.3 on Mechanical 2
199.9,127.8 to 196.4,127.8 on Mechanical 2
103.4,224.3 to 103.4,220.8 on Mechanical 2
196.4,127.8 to 196.4,124.3 on Mechanical 2

## Text inside footprints (layer, text, board x,y; h text height)
CN1: Top Overlay "5V4" at 155.801,189.012 h0.64; Top Overlay "DAT" at 163.167,189.012 h0.64; Top Overlay "GND" at 159.484,189.012 h0.64
CN2: Top Overlay "5V4" at 155.801,219.012 h0.64; Top Overlay "DAT" at 163.167,219.012 h0.64; Top Overlay "GND" at 159.484,219.012 h0.64
CN3: Top Overlay "5V4" at 109.801,219.012 h0.64; Top Overlay "DAT" at 117.167,219.012 h0.64; Top Overlay "GND" at 113.484,219.012 h0.64
CN4: Top Overlay "5V4" at 109.801,189.012 h0.64; Top Overlay "DAT" at 117.167,189.012 h0.64; Top Overlay "GND" at 113.484,189.012 h0.64